# Altium PCB Laderegler_print.PcbDoc
Units mil, origin at the board's own origin, x right, y up, seen from the top; angles counter-clockwise.
Board outline 6000 x 4000 mil, 2 copper layers (Top Layer, Bottom Layer); 42 components, 0 nets, 105 pads, 14 vias.
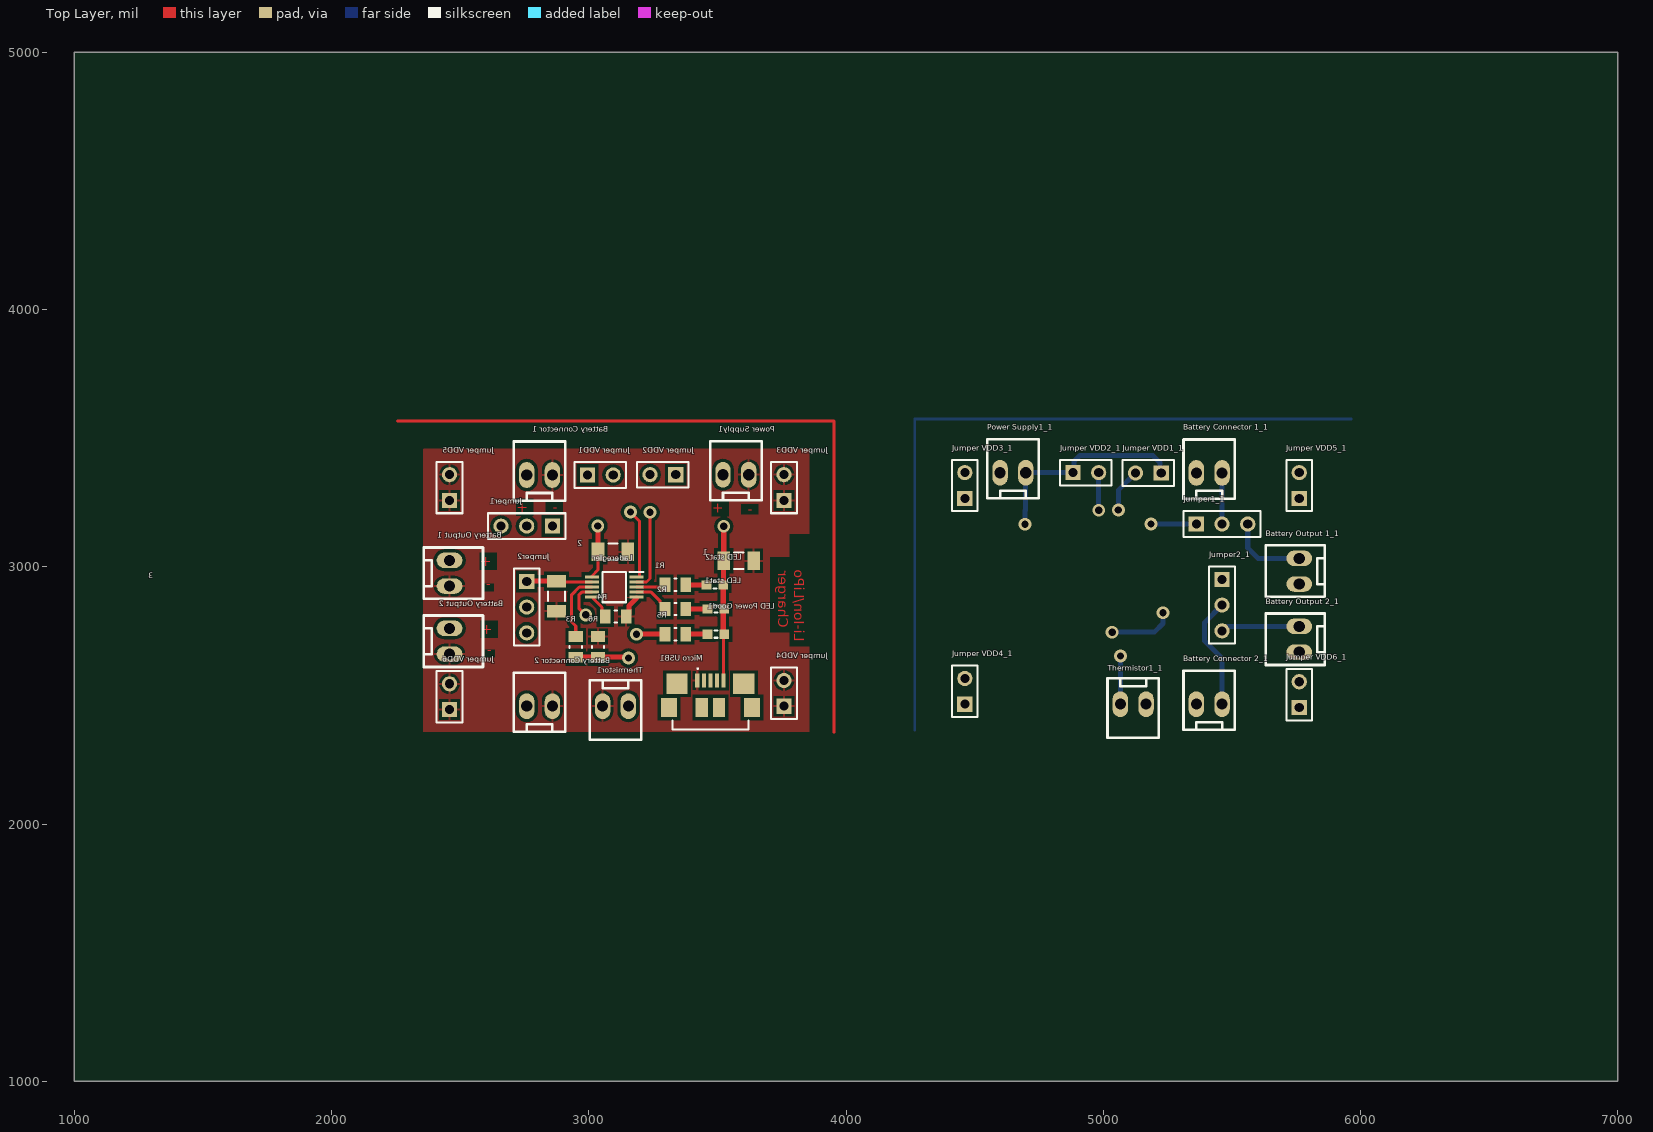
[diagram p0: Top Layer view]
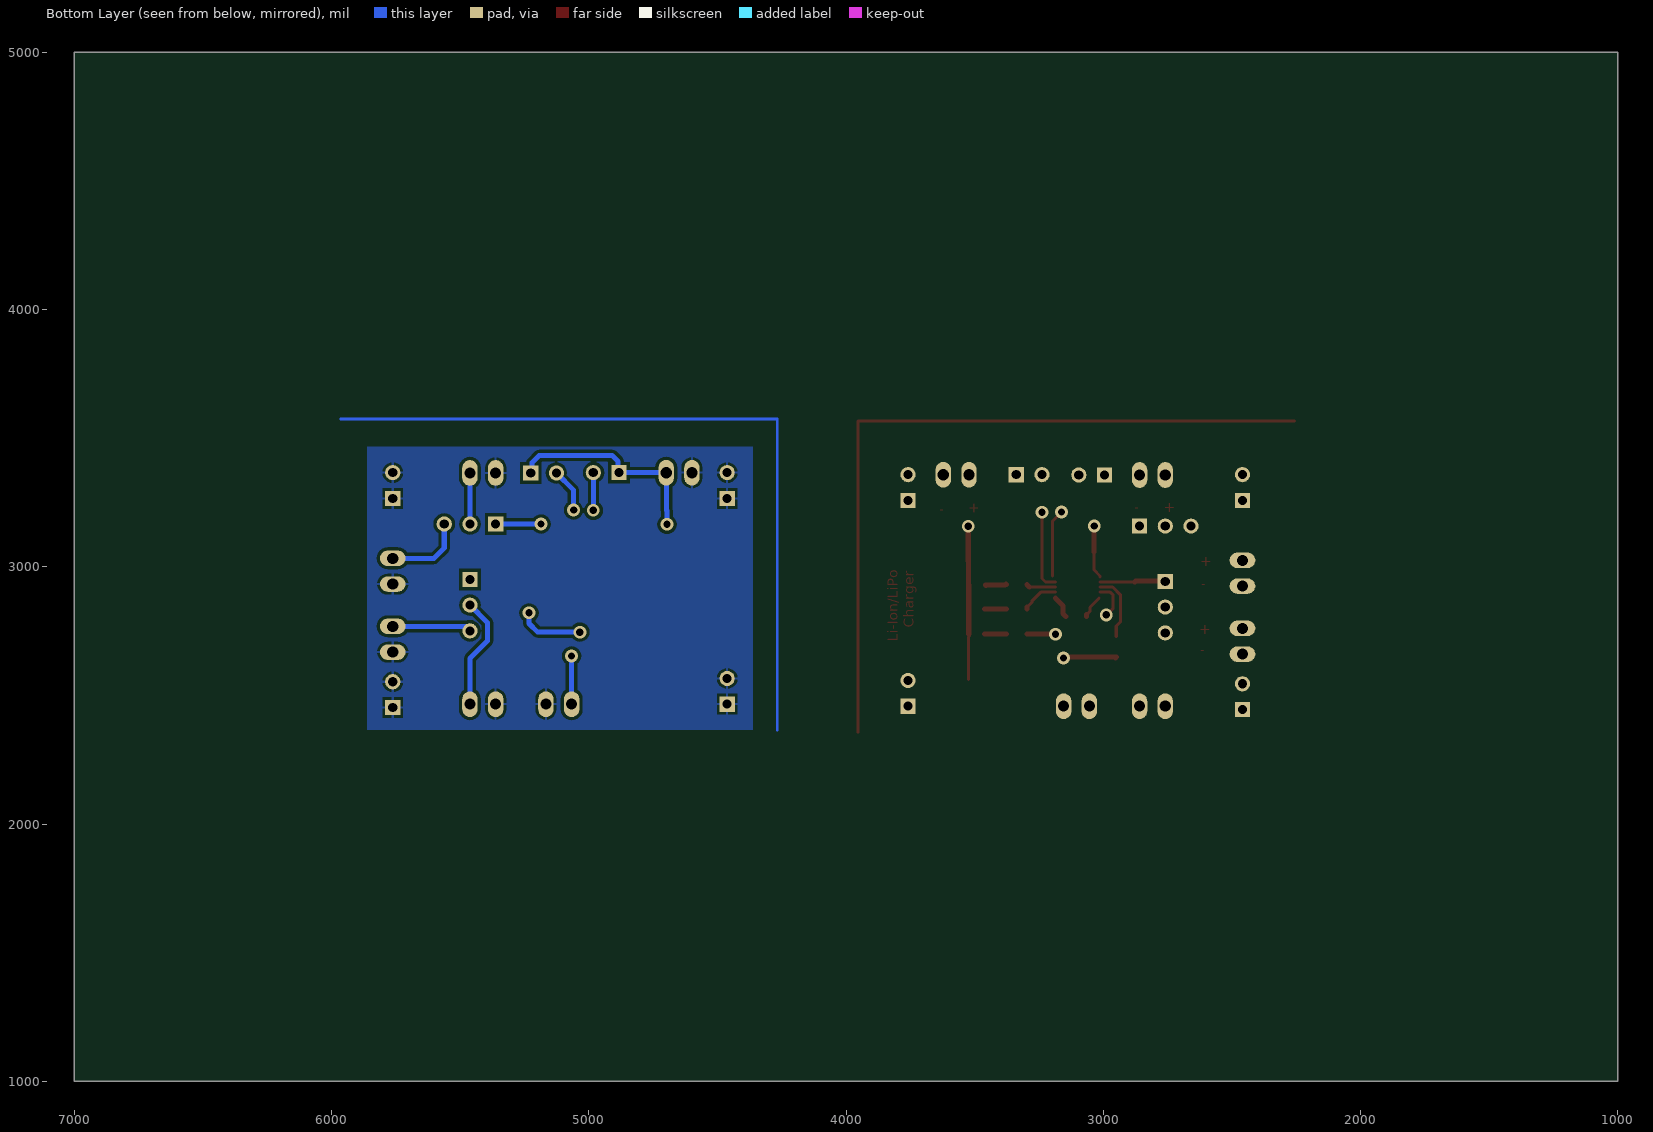
[diagram p1: Bottom Layer view, seen from below]

## Layer stack, top to bottom
Top Solder: solder mask 0.4, Solder Resist, Dk 3.5
Top Layer: signal copper 1.4
Dielectric 1: dielectric 12.6, FR-4, Dk 4.8
Bottom Layer: signal copper 1.4
Bottom Solder: solder mask 0.4, Solder Resist, Dk 3.5

## Board outline
1000,1000 7000,1000 7000,5000 1000,5000

## Design rules (kind name [scope] priority, off if disabled: settings)
Clearance [All] p1: gap=10 ignorepadtopadclearanceinfootprint=FALSE except(0: Arc-Hole Track-Hole SMDPad-Hole THPad-Hole Via-Hole Fill-Hole Poly-Hole Region-Hole Text-Hole)
PolygonConnect [All] p1: connectstyle=Relief reliefconductorwidth=10 reliefentries=4 polygonreliefangle="90 Angle" airgapwidth=10
RoutingVias [All] p1: holewidth=28 width=50 viastyle="Through Hole" minholewidth=28 minwidth=50 maxholewidth=28 maxwidth=50
SolderMaskExpansion [All] p1: expansion=4
Width [All] p1: maxlimit=10 minlimit=10 preferedwidth=10
30 further rules are at their usual default settings.

## Components (designator, comment, footprint, x,y, rotation, side; value= is the part's Value field where it differs from the comment)
1 "VJ1206" VJ1206 3582.8,3023.23 r0 top value=1µF
2 "VJ1206" VJ1206 3094.02,3058.07 r0 top value=1µF
3 "VJ1206" VJ1206 2874.53,2885.63 r270 top value=1µF
"Battery Connector 1" "2er Stiftleiste" "2er Stiftleiste WR-WTB" 2758.78,3356.89 r0 top
"Battery Connector 1_1" "2er Stiftleiste" "2er Stiftleiste WR-WTB" 5461.9,3364.7 r180 top (schematic designator "Battery Connector 1")
"Battery Connector 2" "2er Stiftleiste" "2er Stiftleiste WR-WTB" 2758.78,2458.07 r0 top
"Battery Connector 2_1" "2er Stiftleiste" "2er Stiftleiste WR-WTB" 5461.9,2465.89 r180 top (schematic designator "Battery Connector 2")
"Battery Output 1" "2er Stiftleiste" "2er Stiftleiste WR-WTB" 2458.78,3025 r270 top
"Battery Output 1_1" "2er Stiftleiste" "2er Stiftleiste WR-WTB" 5761.9,3032.81 r270 top (schematic designator "Battery Output 1")
"Battery Output 2" "2er Stiftleiste" "2er Stiftleiste WR-WTB" 2458.78,2760.43 r270 top
"Battery Output 2_1" "2er Stiftleiste" "2er Stiftleiste WR-WTB" 5761.9,2768.25 r270 top (schematic designator "Battery Output 2")
Jumper1 "Header 3" HDR1X3 2858.78,3158.07 r180 top
Jumper1_1 "Header 3" HDR1X3 5361.9,3165.89 r0 top (schematic designator Jumper1)
Jumper2 "Header 3" HDR1X3 2758.78,2943.11 r270 top
Jumper2_1 "Header 3" HDR1X3 5461.9,2950.93 r270 top (schematic designator Jumper2)
"Jumper VDD1" "Header 2" HDR1X2 2995,3356.89 r0 top
"Jumper VDD1_1" "Header 2" HDR1X2 5225.68,3364.7 r180 top (schematic designator "Jumper VDD1")
"Jumper VDD2" "Header 2" HDR1X2 3338.31,3358.07 r180 top
"Jumper VDD2_1" "Header 2" HDR1X2 4882.37,3365.89 r0 top (schematic designator "Jumper VDD2")
"Jumper VDD3" "Header 2" HDR1X2 3758.78,3258.07 r90 top
"Jumper VDD3_1" "Header 2" HDR1X2 4461.9,3265.89 r90 top (schematic designator "Jumper VDD3")
"Jumper VDD4" "Header 2" HDR1X2 3758.78,2458.07 r90 top
"Jumper VDD4_1" "Header 2" HDR1X2 4461.9,2465.89 r90 top (schematic designator "Jumper VDD4")
"Jumper VDD5" "Header 2" HDR1X2 2458.78,3258.07 r90 top
"Jumper VDD5_1" "Header 2" HDR1X2 5761.9,3265.89 r90 top (schematic designator "Jumper VDD5")
"Jumper VDD6" "Header 2" HDR1X2 2458.78,2445.08 r90 top
"Jumper VDD6_1" "Header 2" HDR1X2 5761.9,2452.89 r90 top (schematic designator "Jumper VDD6")
Laderegler "MCP73833-AMI_UN" SOP50P490X110-10N 3098.94,2921.06 r180 top
"LED Power Good1" "LED SMD 0603" "SMD LED 0603" 3494.21,2737.8 r180 top
"LED stat1" "LED SMD 0603" "SMD LED 0603" 3494.21,2836.22 r180 top
"LED stat2" "LED SMD 0603" "SMD LED 0603" 3490.28,2928.74 r180 top
"Micro USB1" "ZX62R-B-5P_30_" ZX62R-B-5P(30) 3472.95,2367.91 r180 top
"Power Supply1" "2er Stiftleiste" "2er Stiftleiste WR-WTB" 3521.77,3357.87 r0 top
"Power Supply1_1" "2er Stiftleiste" "2er Stiftleiste WR-WTB" 4698.9,3365.69 r180 top (schematic designator "Power Supply1")
R1 "RES 0805" D12CRCW0805 3336.73,2930.31 r180 top value=1k
R2 "RES 0805" D12CRCW0805 3336.73,2836.22 r180 top value=1k
R3 "RES 0805" D12CRCW0805 2949.33,2688.78 r90 top value=1k
R4 "RES 0805" D12CRCW0805 3104.84,2806.89 r180 top value=1k
R5 "RES 0805" D12CRCW0805 3336.73,2737.8 r180 top value=1k
R6 "RES 0805" D12CRCW0805 3035.94,2688.78 r270 top value=1k
Thermistor1 "2er Stiftleiste" "2er Stiftleiste WR-WTB" 3154.06,2458.07 r180 top
Thermistor1_1 "2er Stiftleiste" "2er Stiftleiste WR-WTB" 5066.62,2465.89 r0 top (schematic designator Thermistor1)

## Footprints (in the part's own frame and the unit in brackets; to place one, negate y for a bottom-side part, rotate by r counter-clockwise, add the part's x,y. Pads: shape width x height; smd on the part's side, far side on the other; paste and mask are expansions set on the pad)
"2er Stiftleiste WR-WTB" [mil] "2.54MM MALE LOCKING HEADER WÜRTH"
  rrect100% 60x100 hole 43.31: 1(0,0) 2(100,0)
  silkscreen extent -50,-100 150,130, body extent -50,-104 150,124, height 455
D12CRCW0805 [mm] "Chip Resistor, 2-Leads, Body 2,1x1,3mm, IPC Medium Density"
  rect 1.05x1.4 smd: 1(-1.025,0) 2(1.025,0)
  silkscreen extent -0.1,-0.6 0.1,0.6, body extent -1.1,-0.71 1.1,0.71, height 0.51
HDR1X2 [mm] "Connector; Header; 2 Position"
  rect 1.5x1.5 hole 0.9: 1(0,0)
  round 1.5 hole 0.9: 2(2.54,0)
  silkscreen extent -1.27,-1.27 3.81,1.27
HDR1X3 [mm] "Connector; Header; 3 Position"
  rect 1.5x1.5 hole 0.9: 1(0,0)
  round 1.5 hole 0.9: 2(2.54,0) 3(5.08,0)
  silkscreen extent -1.27,-1.27 6.35,1.27
"SMD LED 0603" [mm] "Chip-Capacitor, 0603, found on Farnell"
  rect 0.95x0.9 smd: 1(-0.825,0) 2(0.825,0)
  silkscreen extent -0.15,-0.35 0.15,0.35, body extent -1.11,0.43 1.11,1.28, height 1
SOP50P490X110-10N [mm]
  rect 1.4x0.3 smd: 1(-2.2,-1) 2(-2.2,-0.5) 3(-2.2,0) 4(-2.2,0.5) 5(-2.2,1) 6(2.2,1) 7(2.2,0.5) 8(2.2,0) 9(2.2,-0.5) 10(2.2,-1)
  silkscreen extent -2.9,-1.5 1.15,1.5, body extent -2.45,-1.5 2.45,1.5, height 1.1
VJ1206 [mm] "Ceramic Chip Capacitor Vishay Vitramon"
  rect 1.25x1.85 smd: 1(-1.475,0) 2(1.475,0)
  silkscreen extent -0.45,-0.82 0.45,0.82, body extent -1.56,-39.18 1.56,-37.58, height 1.7
ZX62R-B-5P(30) [mm]
  rect 0.4x1.35 smd: 1(1.3,-4.825) 2(0.65,-4.825) 3(0,-4.825) 4(-0.65,-4.825) 5(-1.3,-4.825)
  rect 2.1x2 smd: 6(-3.3,-4.5) 7(3.3,-4.5)
  rect 1.6x1.9 smd: 8(-4.1,-2.15) 9(4.1,-2.15)
  rect 1.2x1.9 smd: 10(-0.85,-2.15) 11(0.85,-2.15)
  silkscreen extent -3.75,-6.02 3.75,0, body extent -3.1,-0.23 5.7,2.71, height 5.6

## Part data
1 2 3: "Ceramic Chip Capacitor Vishay Vitramon", Fitted=False
"Battery Connector 1" "Battery Connector 1_1" "Battery Connector 2" "Battery Connector 2_1" "Battery Output 1" "Battery Output 1_1" "Battery Output 2" "Battery Output 2_1" "Power Supply1" "Power Supply1_1" Thermistor1 Thermistor1_1: "2er Stiftleiste WR-WTB 2,54mm"
Jumper1 Jumper1_1 Jumper2 Jumper2_1: "Header, 3-Pin", LatestRevisionDate=17-Jul-2002, LatestRevisionNote="Re-released for DXP Platform.", Publisher="Altium Limited"
"Jumper VDD1" "Jumper VDD1_1" "Jumper VDD2" "Jumper VDD2_1" "Jumper VDD3" "Jumper VDD3_1" "Jumper VDD4" "Jumper VDD4_1" "Jumper VDD5" "Jumper VDD5_1" "Jumper VDD6" "Jumper VDD6_1": "Header, 2-Pin", LatestRevisionDate=17-Jul-2002, LatestRevisionNote="Re-released for DXP Platform.", Publisher="Altium Limited"
Laderegler: "Integrated Circuit", Manufacturer_Name=Microchip, Manufacturer_Part_Number=MCP73833-AMI/UN, Mouser2 Part Number=579-MCP73833-AMI/UN, Datasheet Link=https://componentsearchengine.com//MCP73833-AMI_UN.pdf, Height=1.1mm, Mouser2 Price/Stock=https://www.mouser.com/Search/Refine.aspx?Keyword=579-MCP73833-AMI%2FUN
"Micro USB1": "Connector", Manufacturer_Name=Hirose, Manufacturer_Part_Number=ZX62R-B-5P(30)
R1 R2 R3 R4 R5 R6: "Chip Resistor 0805", Supplier Part Number 1=1738935, Fitted=False, Supplier 1=Farnell

## Via types
v1: diameter 50, hole 28, Top Layer to Bottom Layer, 14 vias

## Nets (pads, with @x,y where several pads share a name; then routed paths per layer and width w, separated by ;. In a path a pad name is that pad's centre, name@x,y a point inside that pad or via, vN(x,y) a via of type N, cw(c..) or ccw(c..) an arc to the next point about the centre after c; other vN are vias at no path point)
pads on no net: 1.1 1.2 2.1 2.2 3.1 3.2 "Battery Connector 1.1" "Battery Connector 1.2" "Battery Connector 1_1.1" "Battery Connector 1_1.2" "Battery Connector 2.1" "Battery Connector 2.2" "Battery Connector 2_1.1" "Battery Connector 2_1.2" "Battery Output 1.1" "Battery Output 1.2" "Battery Output 1_1.1" "Battery Output 1_1.2" "Battery Output 2.1" "Battery Output 2.2" "Battery Output 2_1.1" "Battery Output 2_1.2" "Jumper VDD1.1" "Jumper VDD1.2" "Jumper VDD1_1.1" "Jumper VDD1_1.2" "Jumper VDD2.1" "Jumper VDD2.2" "Jumper VDD2_1.1" "Jumper VDD2_1.2" "Jumper VDD3.1" "Jumper VDD3.2" "Jumper VDD3_1.1" "Jumper VDD3_1.2" "Jumper VDD4.1" "Jumper VDD4.2" "Jumper VDD4_1.1" "Jumper VDD4_1.2" "Jumper VDD5.1" "Jumper VDD5.2" "Jumper VDD5_1.1" "Jumper VDD5_1.2" "Jumper VDD6.1" "Jumper VDD6.2" "Jumper VDD6_1.1" "Jumper VDD6_1.2" "LED Power Good1.1" "LED Power Good1.2" "LED stat1.1" "LED stat1.2" "LED stat2.1" "LED stat2.2" "Micro USB1.1" "Micro USB1.2" "Micro USB1.3" "Micro USB1.4" "Micro USB1.5" "Micro USB1.6" "Micro USB1.7" "Micro USB1.8" "Micro USB1.9" "Micro USB1.10" "Micro USB1.11" "Power Supply1.1" "Power Supply1.2" "Power Supply1_1.1" "Power Supply1_1.2" Jumper1.1 Jumper1.2 Jumper1.3 Jumper1_1.1 Jumper1_1.2 Jumper1_1.3 Jumper2.1 Jumper2.2 Jumper2.3 Jumper2_1.1 Jumper2_1.2 Jumper2_1.3 Laderegler.1 Laderegler.2 Laderegler.3 Laderegler.4 Laderegler.5 Laderegler.6 Laderegler.7 Laderegler.8 Laderegler.9 Laderegler.10 R1.1 R1.2 R2.1 R2.2 R3.1 R3.2 R4.1 R4.2 R5.1 R5.2 R6.1 R6.2 Thermistor1.1 Thermistor1.2 Thermistor1_1.1 Thermistor1_1.2
copper on no net: | length 11920.3
  Top Layer w10: 2256.42,3566.73 3953.27,3566.73 3953.27,2356.3 ; 3521.77,3357.87 3522.76,3356.89
  Top Layer w11.81: 2877.48,2940.75 3012.32,2940.75 ; 2949.33,2729.13 2949.33,2769.71 2933.58,2785.46 2933.58,2891.44 2963.21,2921.06 3012.32,2921.06 ; v1@2986.9,2813.19 2961.42,2838.67 2961.42,2889.85 2972.95,2901.38 3012.32,2901.38 ; 3012.32,2960.43 3012.32,2964.37 3035.94,2987.99 3035.94,3058.07 ; 3016.26,2877.76 3051.69,2842.32 3051.69,2826.57 3064.49,2813.78 ; v1(3161.93,3212.4) 3197.36,3176.97 3197.36,2964.37 ; 3185.55,2877.76 3185.55,2881.69 ; 3185.55,2901.38 3242.64,2901.38 3276.1,2867.91 ; 3185.55,2921.06 3287.13,2921.06 ; 3185.55,2940.75 3224.39,2940.75 3238.31,2954.67 v1(3238.31,3211.71) ; 3276.1,2863.39 3296.38,2843.11 ; 3524.13,2561.81 3524.13,2727.36 3520.2,2731.3 3526.69,2737.8
  Top Layer w19.68: 2758.78,2943.11 2760.35,2944.68 2874.92,2944.68 ; 2874.92,2944.09 2874.53,2943.7 2877.48,2940.75 ; 2952.09,2645.67 2949.33,2648.43 3110.75,2648.43 v1@3154.06,2648.43 ; v1@2986.9,2813.19 v1(2988.31,2813.19) ; v1(3035.16,3158.07) 3035.55,3157.68 3035.55,3058.46 3035.94,3058.07 ; 3064.49,2806.89 3064.49,2813.78 ; 3145.2,2806.89 3156.02,2817.72 3156.02,2848.23 3185.55,2877.76 ; v1(3185.94,2737.8) 3296.38,2737.8 ; 3287.13,2921.06 3296.38,2930.31 ; 3296.38,2836.22 3296.38,2843.11 ; 3338.31,3358.07 3339.29,3357.09 ; 3377.09,2737.8 3461.73,2737.8 ; 3377.09,2836.22 3461.73,2836.22 ; 3377.09,2930.31 3378.76,2931.99 3381.22,2929.53 3457.01,2929.53 3457.8,2928.74 3456.12,2927.07 ; 3521.28,3357.38 3521.77,3357.87 ; 3523.44,2743.6 3523.44,2737.8 3522.76,2738.48 3522.76,2928.74 3523.74,2929.72 3523.74,3032.09 3524.72,3033.07 ; 3524.72,3023.23 3524.72,3033.07 ; v1(3524.72,3157.28) 3524.72,3033.07
  Bottom Layer w10: 4267.41,2364.11 4267.41,3574.55 5964.26,3574.55
  Bottom Layer w19.68: v1(4695.95,3165.1) 4695.95,3218.05 4697.43,3219.53 4697.43,3364.21 4698.9,3365.69 4882.17,3365.69 4882.37,3365.89 4885.52,3369.04 4885.52,3409.19 4909.14,3432.81 5192.6,3432.81 5220.16,3405.26 5220.16,3370.22 5225.68,3364.7 ; 4980.79,3365.69 4982.37,3364.11 v1(4982.37,3219.53) ; v1(5034.73,2745.61) 5198.31,2745.61 5232.37,2779.67 v1(5232.37,2821) ; v1(5058.75,3220.22) 5058.75,3297.78 5125.68,3364.7 ; v1(5066.62,2653.48) 5066.62,2465.89 5068.74,2463.77 ; v1@5184.73,3166.67 v1(5185.52,3165.89) 5361.9,3165.89 5362.68,3166.67 ; 5461.11,2951.71 5461.9,2950.93 ; 5461.7,2851.12 5461.9,2850.93 5393.39,2782.42 5393.39,2712.34 5461.7,2644.04 5461.7,2466.08 5461.9,2465.89 ; 5461.9,2750.93 5479.22,2768.25 5761.9,2768.25 ; 5461.9,3165.89 5461.9,3364.7 ; 5561.9,3165.89 5561.9,3072.97 5602.05,3032.81 5761.9,3032.81
  other v1: 3154.06,2645.67

## Polygon pours and split planes (outlines as drawn)
no net on Bottom Layer (solid, pour order 4): 4361.9,2364.11 4363.67,2365.89 5861.9,2365.89 5861.9,3465.89 4361.9,3465.89
no net on Top Layer (solid, pour order 6): 2357.2,2358.07 2357.2,3456.3 2358.98,3458.07 3857.2,3458.07 3857.2,2359.65 3858.78,2358.07

## Other copper
Top Layer:
  text "+" at 2764.29,3212.4 h39.37
  text "-" at 2878.46,3211.71 h39.37
  text "+" at 3524.72,3210.24 h39.37
  text "-" at 3638.31,3204.53 h39.37
  text "+" at 2622.56,3001.77 h39.37
  text "-" at 2618.62,2905.32 h60
  text "Charger" at 3736.73,2763.58 h39.37 r270
  text "+" at 2626.5,2737.99 h39.37
  text "Li-Ion/LiPo" at 3799.72,2708.46 h39.37 r270
  text "-" at 2622.56,2648.43 h60

## Text inside footprints (layer, text, board x,y; h text height)
"LED Power Good1": Mechanical 15 "+" at 3549.21,2772.8 h39.37
"LED stat1": Mechanical 15 "+" at 3549.21,2871.22 h39.37
"LED stat2": Mechanical 15 "+" at 3545.28,2963.74 h39.37